# Altium PCB Rocket.PcbDoc
Units mm, origin at the board's own origin, x right, y up, seen from the top; angles counter-clockwise.
Board outline 60 x 30 mm, 2 copper layers (Top Layer, Bottom Layer); 62 components, 47 nets, 213 pads, 0 vias.
Unrouted connection lines stored in the file: 136.
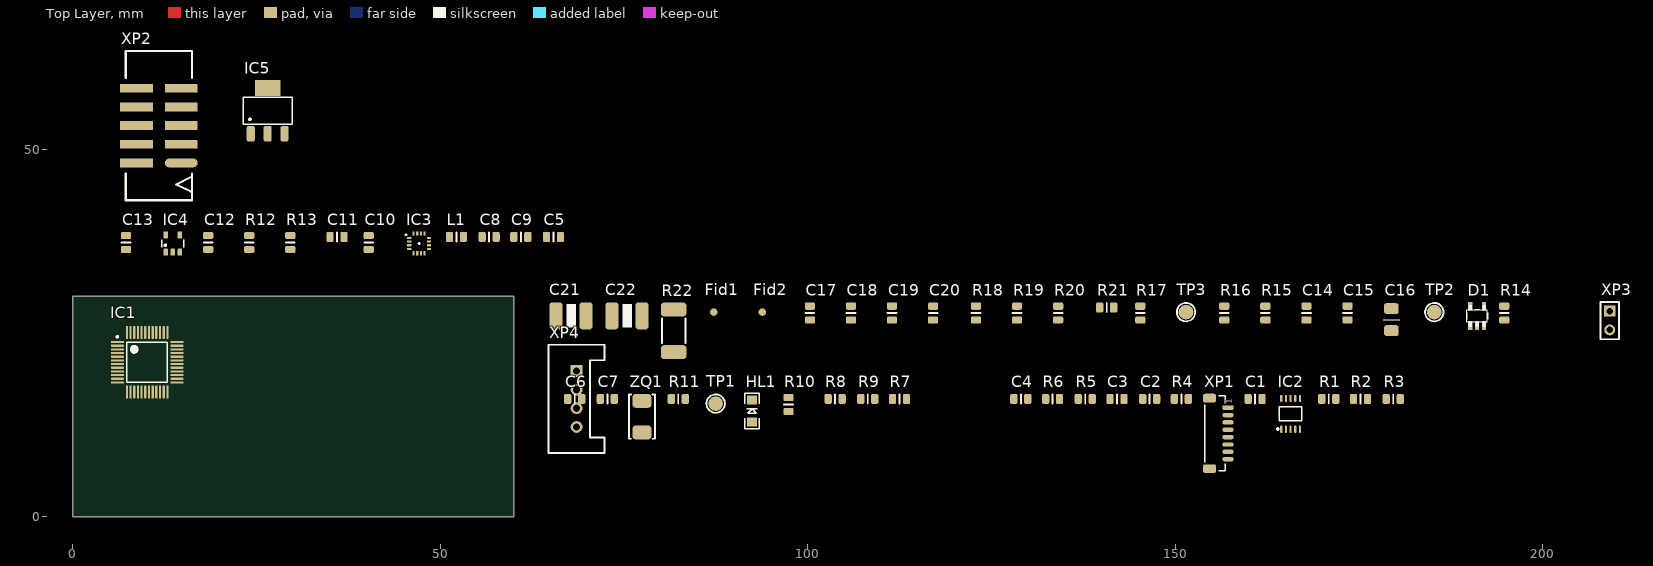
[diagram p0: Top Layer view]
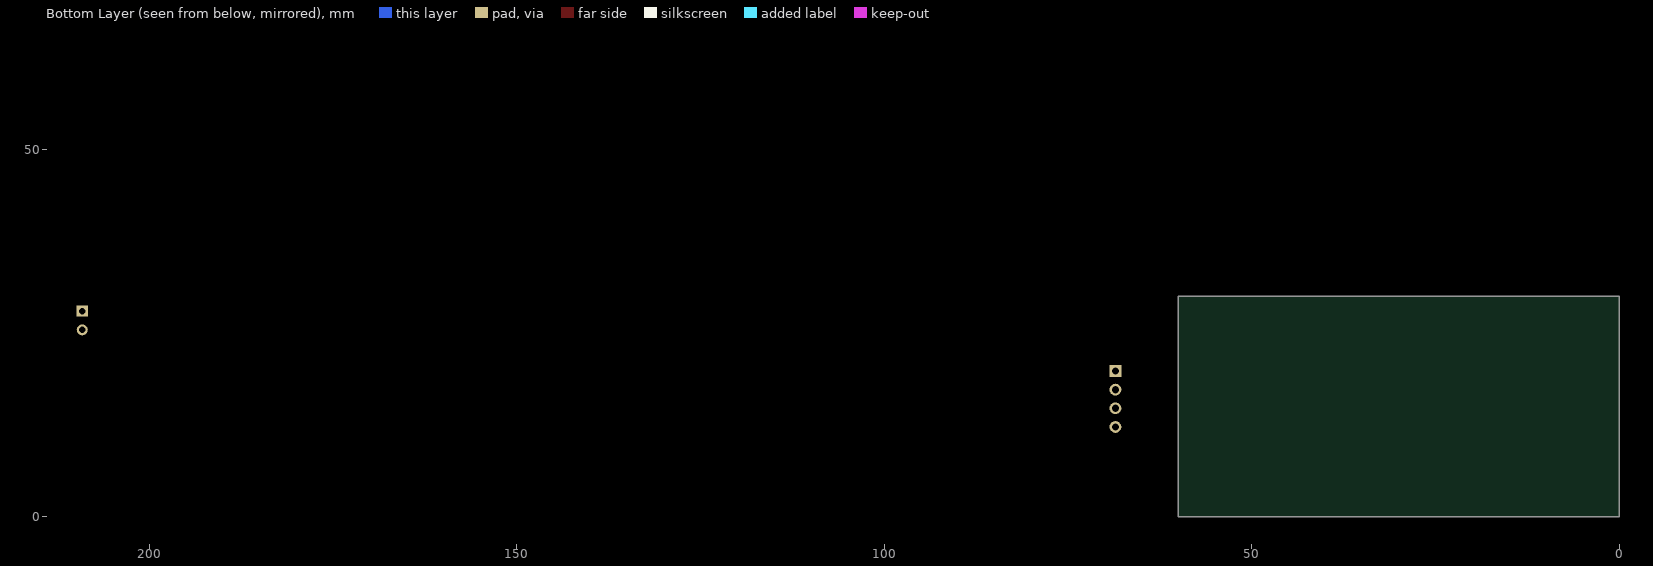
[diagram p1: Bottom Layer view, seen from below]

## Layer stack, top to bottom
Top Layer: signal copper 0.0356
Dielectric: dielectric 0.32, FR-4, Dk 4.8
Bottom Layer: signal copper 0.0356

## Board outline
0,0 0,30 60,30 60,0 0,0

## Design rules (kind name [scope] priority, off if disabled: settings)
Clearance [All] p1: gap=0.254
PolygonConnect [All] p1: connectstyle=Relief reliefconductorwidth=0.254 reliefentries=4 polygonreliefangle="90 Angle"
RoutingVias [All] p1: holewidth=0.711 width=1.27 viastyle="Through Hole" minholewidth=0.711 minwidth=1.27 maxholewidth=0.711 maxwidth=1.27
SilkscreenOverComponentPads [All] p1: minsilkscreentomaskgap=0.254
SolderMaskExpansion [All] p1: expansion=0.102
Width [All] p1: maxlimit=0.254 minlimit=0.254 preferedwidth=0.254
27 further rules are at their usual default settings.

## Components (designator, comment, footprint, x,y, rotation, side; value= is the part's Value field where it differs from the comment)
C1 "100nF" 0805C 160.863,16.004 r0 top
C2 "100nF" 0805C 146.512,16.004 r0 top
C3 "100nF" 0805C 142.067,16.004 r0 top
C4 "470pF" 0805C 128.986,16.004 r0 top
C5 "100nF" 0805C 65.396,38.05 r0 top
C6 "100nF" 0805C 68.28,16.004 r0 top
C7 "100nF" 0805C 72.725,16.004 r0 top
C8 "22pF" 0805C 56.633,38.05 r0 top
C9 "22pF" 0805C 60.951,38.05 r0 top
C10 "1µF" 0805C 40.25,37.288 r90 top
C11 "100nF" 0805C 35.932,38.05 r0 top
C12 "4.7uF" 0805C 18.406,37.288 r90 top
C13 "0.22uF" 0805C 7.23,37.288 r90 top
C14 "100nF" 0805C 167.848,27.688 r90 top
C15 "10nF" 0805C 173.436,27.688 r90 top
C16 "22µF" C1206K 179.405,26.799 r90 top
C17 "470pF" 0805C 100.284,27.688 r90 top
C18 "470pF" 0805C 105.872,27.688 r90 top
C19 "470pF" 0805C 111.46,27.688 r90 top
C20 "470pF" 0805C 117.048,27.688 r90 top
C21 "1nF" C1812K 67.772,27.307 r0 top
C22 "1nF" C1812K 75.392,27.307 r0 top
D1 "ESDA5V3SC6" SOT23-5 191.089,27.307 r0 top
Fid1 "Fiducial" Fiducial 87.203,27.815 r0 top
Fid2 "Fiducial" Fiducial 93.807,27.815 r90 top
HL1 "LED Grьn" LED-1206R 92.41,14.353 r90 top
IC1 "STM32F103C8T6" LQFP48_N 10.1,21 r0 top
IC2 "ADM101E" MSOP10 165.689,13.972 r0 top
IC3 "HMC5883L" LCC16 47.108,37.161 r0 top
IC4 "24AA04T-I/OT" SOT-23-5 13.58,37.161 r0 top
IC5 "LM3940IMP-3.3/NOPB" SOT-223 26.5,55.2 r0 top
L1 "220 Ohm" 0805L 52.188,38.05 r0 top
R1 "10k" 0805R 170.896,16.004 r0 top
R2 "10k" 0805R 175.214,16.004 r0 top
R3 "10k" 0805R 179.659,16.004 r0 top
R4 "10k" 0805R 150.83,16.004 r0 top
R5 "100" 0805R 137.749,16.004 r0 top
R6 "100" 0805R 133.304,16.004 r0 top
R7 "100" 0805R 112.476,16.004 r0 top
R8 "10k" 0805R 103.713,16.004 r0 top
R9 "10k" 0805R 108.158,16.004 r0 top
R10 "10k" 0805R 97.363,15.242 r90 top
R11 "270" 0805R 82.377,16.004 r0 top
R12 "4.7k" 0805R 23.994,37.288 r90 top
R13 "4.7k" 0805R 29.582,37.288 r90 top
R14 "22k" 0805R 194.772,27.688 r90 top
R15 "22k" 0805R 162.26,27.688 r90 top
R16 "22k" 0805R 156.672,27.688 r90 top
R17 "22k" 0805R 145.242,27.688 r90 top
R18 "4.7k" 0805R 122.89,27.688 r90 top
R19 "4.7k" 0805R 128.478,27.688 r90 top
R20 "4.7k" 0805R 134.066,27.688 r90 top
R21 "4.7k" 0805R 140.67,28.45 r0 top
R22 "2.2M" 2512R 81.742,25.275 r90 top
TP1 "Test point" TESTP1 87.457,15.369 r0 top
TP2 "Test point" TESTP1 185.247,27.815 r0 top
TP3 "Test point" TESTP1 151.465,27.815 r0 top
XP1 "BM08B-SRSS-TB(LF)(SN)" SH8 155.402,11.305 r90 top
XP2 "BH-10" "BH-10 SMD" 11.7,53.2 r90 top
XP3 "CON 1x2" PLS-02 209.123,26.672 r90 top
XP4 "2.5 MSF 04" "2.5 MSF 04" 68.534,16.004 r90 top
ZQ1 "8MHz" ABM7 77.424,13.591 r90 top

## Footprints (in the part's own frame and the unit in brackets; to place one, negate y for a bottom-side part, rotate by r counter-clockwise, add the part's x,y. Pads: shape width x height; smd on the part's side, far side on the other; paste and mask are expansions set on the pad)
"2.5 MSF 04" [mm] "Lumberg 2.5 MSF 04 Connector"
  rect 1.6x1.6 hole 1: 1(3.81,0)
  round 1.6 hole 1: 2(1.27,0) 3(-1.27,0) 4(-3.81,0)
  silkscreen extent -7.37,-3.81 7.37,3.81, body extent -6.1,-3.75 6.1,3.75, height 22.5
0805C [mm] "Chip Capacitor, Size 0805 (2012)"
  rrect50% 1x1.4 smd: 1(-0.95,0) 2(0.95,0)
  silkscreen extent 0,-0.6 0,0.6, body extent -1,-0.63 1,0.63, height 0.7
0805L [mm] "Chip Inductance, Size 0805 (2012)"
  rrect50% 1x1.4 smd: 1(-0.95,0) 2(0.95,0)
  silkscreen extent 0,-0.6 0,0.6, body extent -1,-0.63 1,0.63, height 0.7
0805R [mm] "Chip Resistor, Size 0805 (2012)"
  rrect50% 1x1.4 smd: 1(-0.95,0) 2(0.95,0)
  silkscreen extent 0,-0.6 0,0.6, body extent -1,-0.62 1,0.63, height 0.78
2512R [mm] "Chip Resistor, Size 2512 (6332)"
  rrect50% 1.9x3.5 smd: 1(-2.9,0) 2(2.9,0)
  silkscreen extent -1.65,-1.6 1.65,1.6, body extent -3.16,-1.6 3.16,1.6, height 0.62
ABM7 [mm] "Quartz Crystal, SMD; 2 Leads; Body 6.0 x 3.5 mm"
  rrect50% 1.9x2.6 smd: 1(-2.15,0) 2(2.15,0)
  silkscreen extent -3,-1.78 3,1.78, body extent -3.05,-1.75 3.05,1.75, height 1.44
"BH-10 SMD" [mm] "Connector; 5x2; SMD"
  oval 1.2x4.46 smd: 1(-5.08,-3.048)
  rect 1.2x4.46 smd: 2(-5.08,3.052) 3(-2.54,-3.048) 4(-2.54,3.048) 5(0,-3.048) 6(0,3.048) 7(2.54,-3.048) 8(2.54,3.048) 9(5.08,-3.048) 10(5.08,3.048)
  silkscreen extent -10.16,-4.5 10.16,4.5, body extent -10.16,-4.7 10.16,4.8, height 10.65
C1206K [mm]
  rrect50% 1.5x2 smd: 1(-1.501,0) 2(1.499,0)
  silkscreen extent 0,-1.14 0,1.12, body extent -1.6,-0.8 1.6,0.8, height 1
C1812K [mm]
  rrect50% 1.8x3.7 smd: 1(-2.05,0) 2(2.05,0)
  silkscreen extent -0.64,-1.6 0.69,1.6, body extent -2.25,-1.6 2.25,1.6, height 1.6
Fiducial [mm] "Fiducial point for production"
  round 1 smd paste-0.5 mask+1: FID(0,0)
LCC16 [mm] "16-Pin Leaded Chip Carrier 0.5 mm Pitch, IPC Low Density"
  rrect25% 0.6x0.3 smd: 1(-1.35,0.75) 2(-1.35,0.25) 3(-1.35,-0.25) 4(-1.35,-0.75) 9(1.35,-0.75) 10(1.35,-0.25) 11(1.35,0.25) 12(1.35,0.75)
  rrect25% 0.3x0.6 smd: 5(-0.75,-1.35) 6(-0.25,-1.35) 7(0.25,-1.35) 8(0.75,-1.35) 13(0.75,1.35) 14(0.25,1.35) 15(-0.25,1.35) 16(-0.75,1.35)
  silkscreen extent -1.91,-0.1 0.1,1.28, body extent -1.5,-1.5 1.5,1.5, height 0.9
LED-1206R [mm] "red"
  rect 1.2x1.4 smd: A(-1.499,0) C(1.501,0)
  silkscreen extent -2.4,-1 2.4,1, body extent -1.57,-0.79 1.63,0.81, height 1.11
LQFP48_N [mm] "Thin QFP, 48-Leads, Body 7x7mm, Pitch 0.5mm, IPC Medium Density"
  oval 1.8x0.3 smd: 1(-4.05,2.75) 2(-4.05,2.25) 3(-4.05,1.75) 4(-4.05,1.25) 5(-4.05,0.75) 6(-4.05,0.25) 7(-4.05,-0.25) 8(-4.05,-0.75) 9(-4.05,-1.25) 10(-4.05,-1.75) 11(-4.05,-2.25) 12(-4.05,-2.75) 25(4.05,-2.75) 26(4.05,-2.25) 27(4.05,-1.75) 28(4.05,-1.25) 29(4.05,-0.75) 30(4.05,-0.25) 31(4.05,0.25) 32(4.05,0.75) 33(4.05,1.25) 34(4.05,1.75) 35(4.05,2.25) 36(4.05,2.75)
  oval 0.3x1.8 smd: 13(-2.75,-4.05) 14(-2.25,-4.05) 15(-1.75,-4.05) 16(-1.25,-4.05) 17(-0.75,-4.05) 18(-0.25,-4.05) 19(0.25,-4.05) 20(0.75,-4.05) 21(1.25,-4.05) 22(1.75,-4.05) 23(2.25,-4.05) 24(2.75,-4.05) 37(2.75,4.05) 38(2.25,4.05) 39(1.75,4.05) 40(1.25,4.05) 41(0.75,4.05) 42(0.25,4.05) 43(-0.25,4.05) 44(-0.75,4.05) 45(-1.25,4.05) 46(-1.75,4.05) 47(-2.25,4.05) 48(-2.75,4.05)
  silkscreen extent -4.17,-2.75 2.75,3.57, body extent -3.5,-3.5 3.5,3.5, height 1.6
MSOP10 [mm] "uSOIC, 10-Leads, Body 3x3mm, Pitch 0.5mm"
  oval 0.305x1 smd: 1(-1.27,-2.1) 2(-0.635,-2.1) 3(0,-2.1) 4(0.635,-2.1) 5(1.27,-2.1) 6(1.27,2.1) 7(0.635,2.1) 8(0,2.1) 9(-0.635,2.1) 10(-1.27,2.1)
  silkscreen extent -1.87,-2.17 1.55,0.95, body extent -1.6,-1.6 1.6,1.6, height 1.09
PLS-02 [mm] "Connector; Header; 2 Pin"
  rect 1.5x1.5 hole 0.9: 1(1.27,0)
  round 1.5 hole 0.9: 2(-1.27,0)
  silkscreen extent -2.54,-1.27 2.54,1.27, body extent -2.54,-1.27 2.54,1.27, height 8.54
SH8 [mm] "SH connector, 8 pins"
  rrect50% 1.2x1.8 smd: 0(-4.795,0.742) 0(4.805,0.742)
  rrect50% 0.6x1.55 smd: 1(3.505,-1.778)
  oval 0.6x1.55 smd: 2(2.505,-1.778) 3(1.505,-1.778) 4(0.505,-1.778) 5(-0.495,-1.778) 6(-1.495,-1.778) 7(-2.495,-1.778) 8(-3.495,-1.778)
  silkscreen extent -5.1,-1.4 5.1,1.4, body extent -5.15,-2.17 5.15,1.43, height 4.25
SOT23-5 [mm]
  rect 0.55x1.2 smd: 1(-0.95,-1.3) 2(0,-1.3) 3(0.95,-1.3) 4(0.95,1.3) 5(-0.95,1.3)
  silkscreen extent -1.42,-1.5 1.42,1.5, body extent -1.5,-1.5 1.5,1.5, height 1.3
SOT-23-5 [mm] "SOT-23; 5 Leads; Body 3.1 x 2.5 mm, inc. leads"
  rrect50% 0.65x0.95 smd: 1(-0.95,-1.175) 2(0,-1.175) 3(0.95,-1.175) 4(0.95,1.175) 5(-0.95,1.175)
  silkscreen extent -1.5,-0.51 1.5,0.51, body extent -1.5,-0.7 1.5,0.7, height 1.11
SOT-223 [mm] "SOT-223/SC-73; 4 Leads; Body 6.7 x 7.3 mm, inc. leads"
  rrect50% 1.1x2.15 smd: 1(-2.3,-3.1) 2(0,-3.1) 3(2.3,-3.1)
  rect 3.5x2.15 smd: 4(0,3.1)
  silkscreen extent -3.35,-1.85 3.35,1.85, body extent -3.25,-3.43 3.25,3.57, height 1.65
TESTP1 [mm] "Test point footprint"
  round 2 smd paste-1 mask+0.5: 1(0,0)
  silkscreen extent -1.25,-1.25 1.25,1.25

## Part data
C1 C2 C3 C4 C5 C6 C7 C8 C9 C10 C11 C12 C13 C14 C15 C16 C17 C18 C19 C20 C21 C22: library part "C CERAMIC", "CAP CER"
D1: "Quad ESD protection diode"
HL1: library part LED, "LED 1206 Grьn"
IC1: "32-Bit ARM Cortex-M3, 72 MHz, 64 KB, 20 KB, 48, VFQFPN"
IC2: "+5V, 1-Channel RS-232 Driver/Receiver"
IC3: "3-Axis Digital Compass"
IC4: library part 24AA04, "4K I2C Serial EEPROM"
IC5: library part LM3940, "1A Low-Dropout Regulator for 5V to 3.3V Conversion"
L1: library part "FERRITE CHIP 220 OHM", "FERRITE CHIP 220 OHM 2000MA 0805"
R1 R2 R3 R4 R5 R6 R7 R8 R9 R10 R11 R12 R13 R14 R15 R16 R17 R18 R19 R20 R21 R22: library part Resistor, "Resistor"
XP1: library part "CON 1x8 ISP", "Connector ISP SMD"
XP2: library part "CON 2x5", "Connector"
XP3 XP4: "Connector"
ZQ1: library part "Quarz 25MHz 6 x 3.5", "QUARZ, 25MHZ, ABRACON  ABM7-25.000MHZ-D2Y-T, 18PF, SMD"

## Nets (pads, with @x,y where several pads share a name; then routed paths per layer and width w, separated by ;. In a path a pad name is that pad's centre, name@x,y a point inside that pad or via, vN(x,y) a via of type N, cw(c..) or ccw(c..) an arc to the next point about the centre after c; other vN are vias at no path point)
3V3: C5.2 C6.2 C7.2 C11.2 C15.2 C16.2 IC1.1 IC1.24 IC1.36 IC1.48 IC3.2 IC3.4 IC3.13 IC4.4 IC5.3 L1.2 R1.2 R2.2 R3.2 R11.1 R12.1 R13.1 TP2.1 XP1.1 XP3.2
5V: C3.2 C14.2 IC2.10 IC5.1
AIN0: C20.2 D1.1 IC1.10 R14.2 R21.1
AIN1: C19.2 D1.3 IC1.11 R15.2 R20.1
AIN8: C18.2 D1.4 IC1.18 R16.2 R19.1
AIN9: C17.2 D1.5 IC1.19 R17.2 R18.1
BOOT0: IC1.44 R9.2 XP1.7 XP3.1
CONF: IC1.28 R10.1
DRDY: IC3.15
GND: C2.1 C3.1 C4.1 C5.1 C6.1 C7.1 C8.2 C9.2 C10.2 C11.1 C12.1 C14.1 C15.1 C16.1 C17.1 C18.1 C19.1 C20.1 C21.1 C22.1 D1.2 IC1.8 IC1.23 IC1.35 IC1.47 IC2.1 IC2.8 IC3.9 IC3.11 IC4.2 IC4.5 IC5.2 IC5.4 R4.2 R8.1 R9.1 R10.2 R18.2 R19.2 R20.2 R21.2 R22.2 TP3.1 XP1.8 XP2.9
LED_BRD: HL1.C IC1.27 TP1.1
MISO: IC1.16
MOSI: IC1.17
NetC1_1: C1.1 IC2.9
NetC1_2: C1.2 IC2.2
NetC2_2: C2.2 IC2.3
NetC4_2: C4.2 IC2.6 R6.1
NetC10_1: C10.1 IC1.9 L1.1
NetC12_2: C12.2 IC3.10
NetC13_1: C13.1 IC3.12
NetC13_2: C13.2 IC3.8
NetHL1_A: HL1.A R11.2
NetIC1_20: IC1.20 R4.1
NetIC2_7: IC2.7 R5.1
NetR3_1: R3.1 R7.2 XP1.6
NetR5_2: R5.2 XP2.5
NetR6_2: R6.2 XP2.3
NetR14_1: R14.1 XP4.1
NetR15_1: R15.1 XP4.2
NetR16_1: R16.1 XP4.3
NetR17_1: R17.1 XP4.4
OSC_IN: C8.1 IC1.5 ZQ1.1
OSC_OUT: C9.1 IC1.6 ZQ1.2
PE: C21.2 C22.2 R22.1
RES: IC1.7 R7.1
RXD1: IC1.31 IC2.5 R1.1 XP1.2
RXD2: IC1.13
RXD3: IC1.22
SCK: IC1.15
SCL: IC1.42 IC3.1 IC4.1 R12.2
SD_CS: IC1.14
SDA: IC1.43 IC3.16 IC4.3 R13.2
SWCLK: IC1.37 R8.2 XP1.5
SWDIO: IC1.34 R2.1 XP1.4
TXD1: IC1.30 IC2.4 XP1.3
TXD2: IC1.12
TXD3: IC1.21
pads on no net: Fid1.FID Fid2.FID IC1.2 IC1.3 IC1.4 IC1.25 IC1.26 IC1.29 IC1.32 IC1.33 IC1.38 IC1.39 IC1.40 IC1.41 IC1.45 IC1.46 IC3.3 IC3.5 IC3.6 IC3.7 IC3.14 XP1.0 XP2.1 XP2.2 XP2.4 XP2.6 XP2.7 XP2.8 XP2.10

## Text inside footprints (layer, text, board x,y; h text height)
XP1: Top Overlay "1" at 157.942,15.318 h1.27 r90